# Altium PCB MPU6050_Board.PcbDoc
Units mil, origin at the board's own origin, x right, y up, seen from the top; angles counter-clockwise.
Board outline 825 x 1075 mil, 2 copper layers (Top Layer, Bottom Layer), stack 42.17 mil thick; 4 components, 7 nets, 27 pads, 4 vias.
Unrouted connection lines stored in the file: 2.
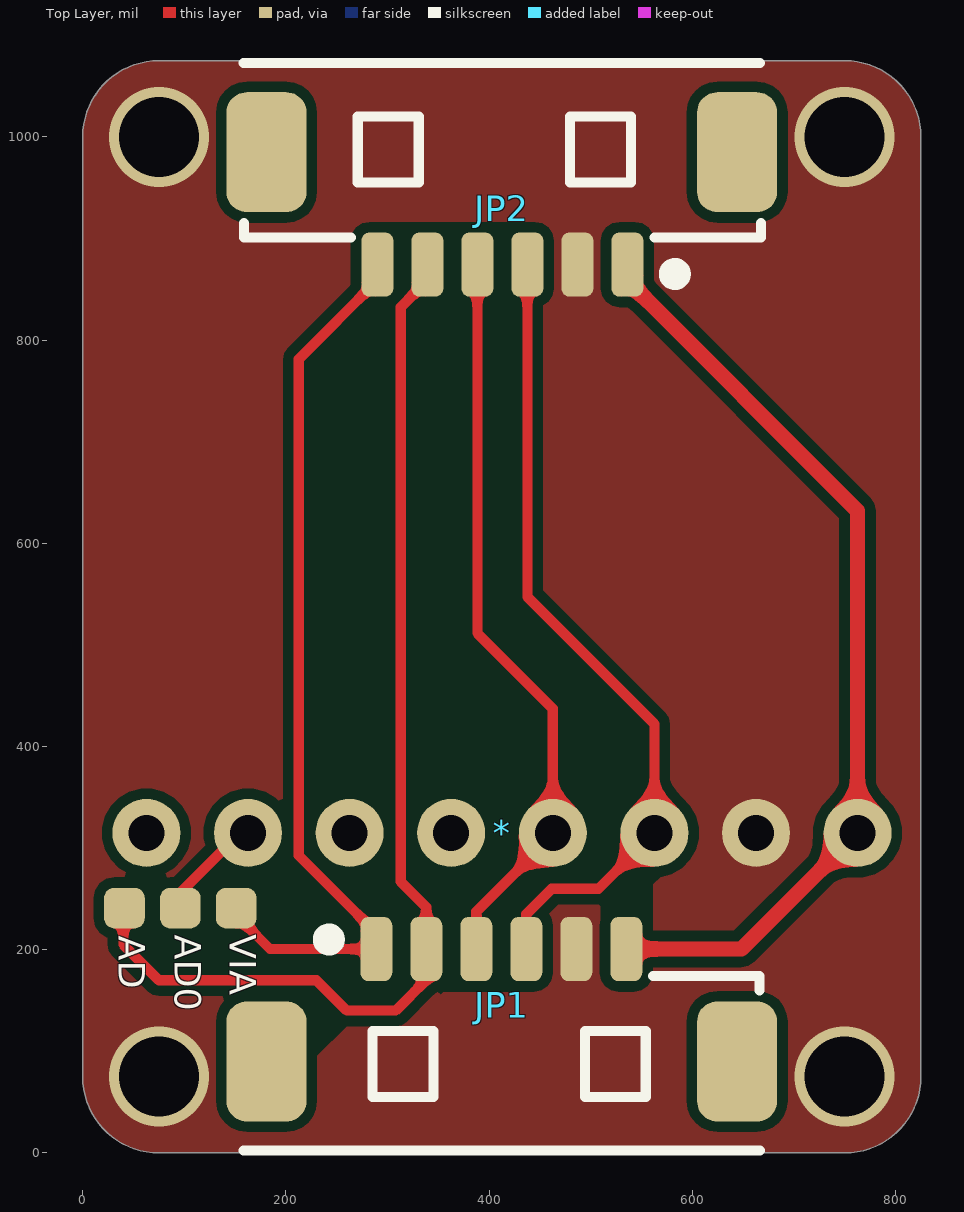
[diagram p0: Top Layer view]
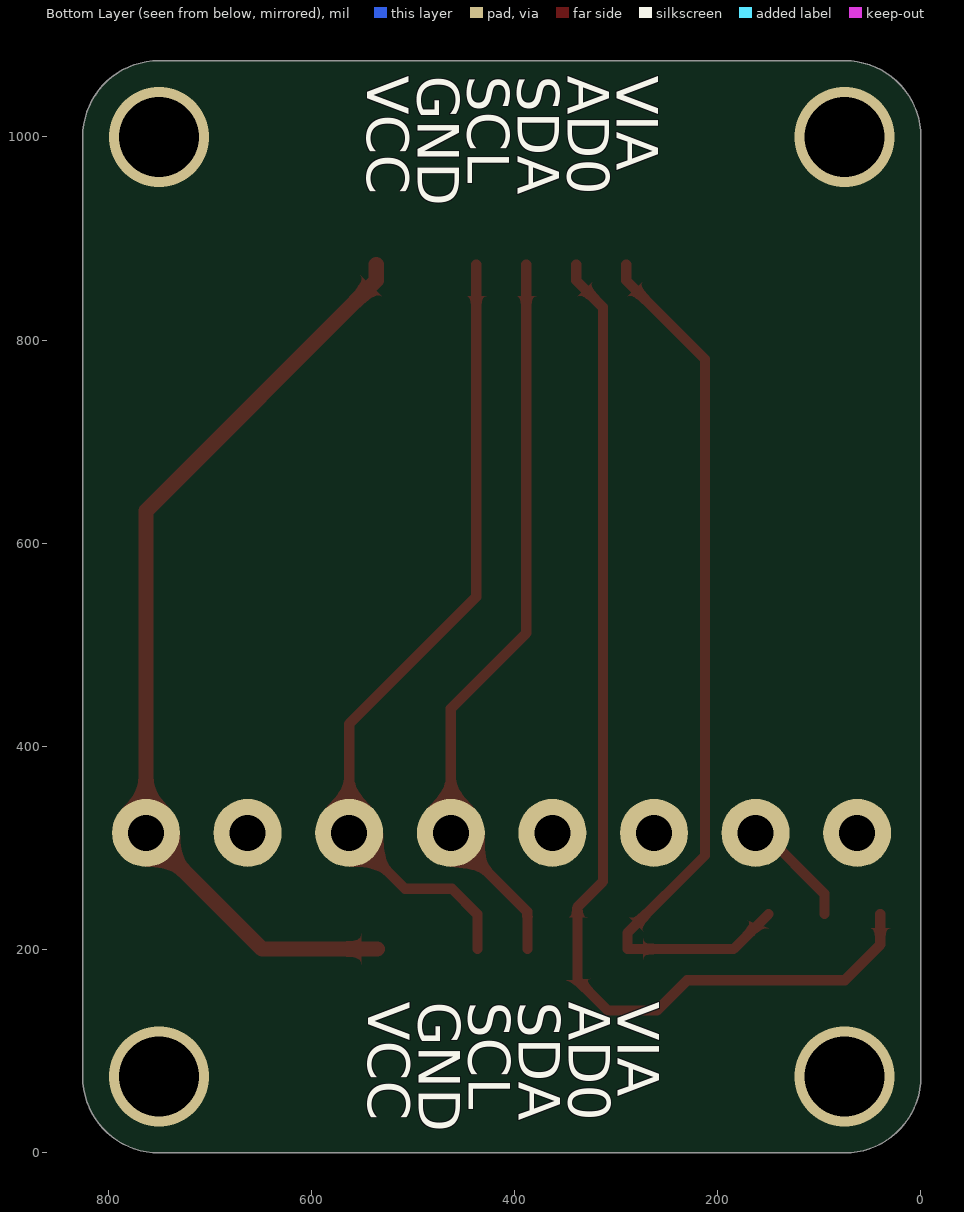
[diagram p1: Bottom Layer view, seen from below]
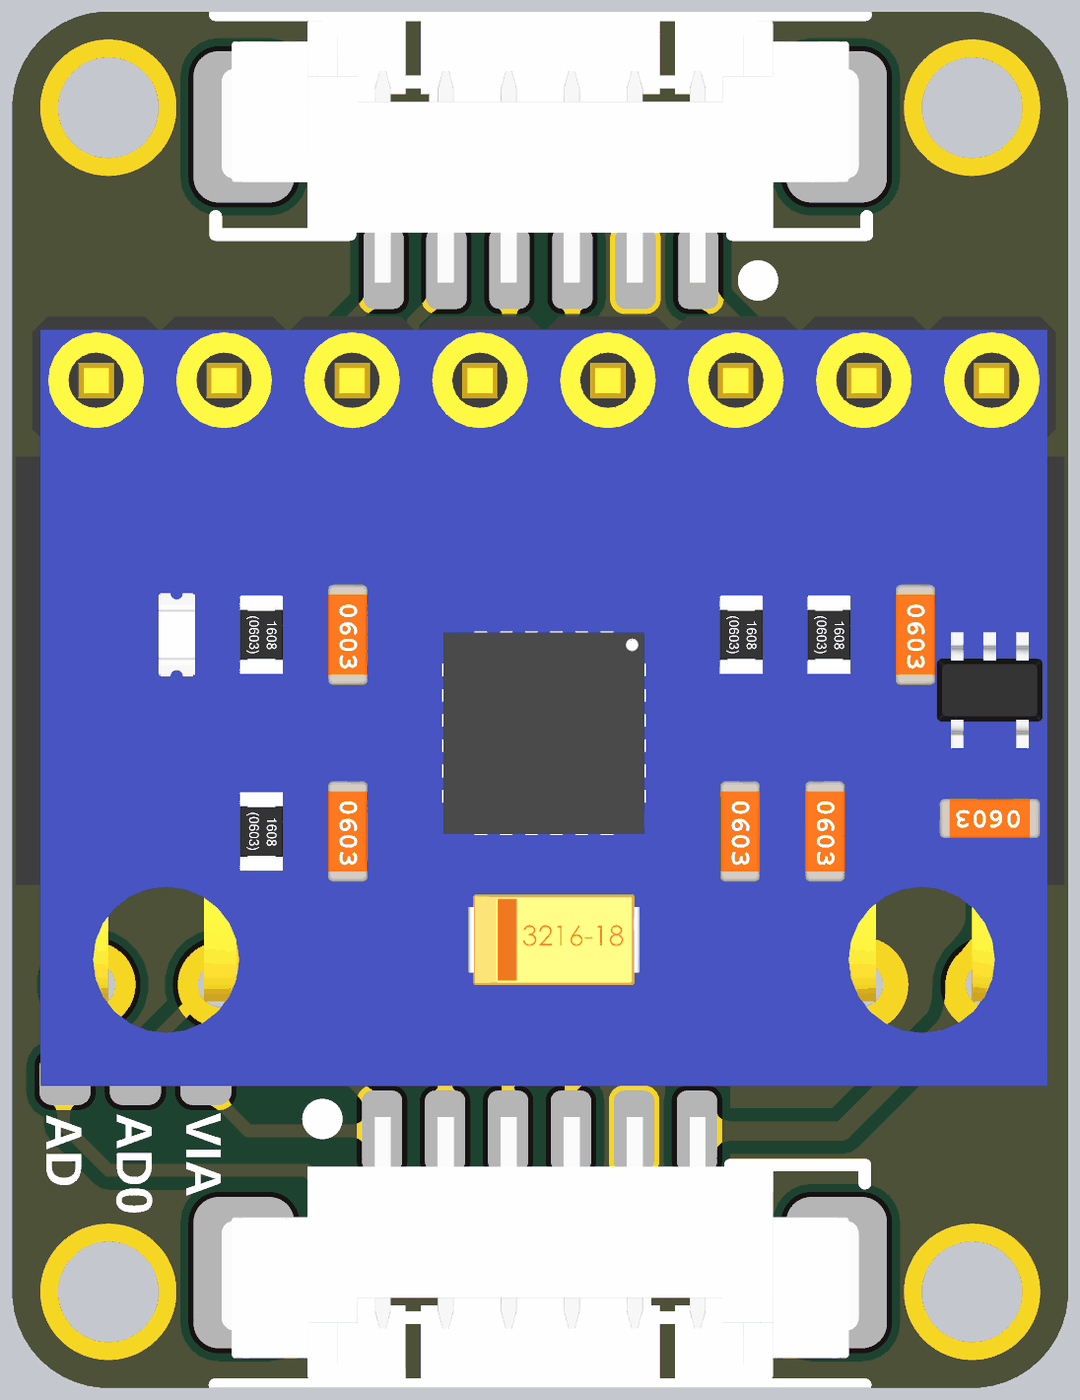
[diagram p2: 3D render of the assembled board from above, using the file's embedded part models]

## Layer stack, top to bottom
Top Solder: solder mask 0.4, Solder Resist, Dk 3.5
Top Layer: signal copper 1.4
Dielectric 1: dielectric 39.3701, FR-4, Dk 4.8
Bottom Layer: signal copper 1.4
Bottom Solder: solder mask 0.4, Solder Resist, Dk 3.5

## Board outline
0,75 0,1000 cw(c75,1000) 75,1075 750,1075 cw(c750,1000) 825,1000 825,75 cw(c750,75) 750,0 75,0 cw(c75,75)

## Design rules (kind name [scope] priority, off if disabled: settings)
Clearance [All] p1: gap=6 ignorepadtopadclearanceinfootprint=FALSE except(0: Arc-Hole Track-Hole SMDPad-Hole THPad-Hole Via-Hole Fill-Hole Poly-Hole Region-Hole Text-Hole; 10: Arc-Fill Arc-Poly Arc-Region Track-Fill Track-Poly Track-Region SMDPad-Fill SMDPad-Poly SMDPad-Region THPad-Fill THPad-Poly THPad-Region Via-Fill Via-Poly Via-Region Fill-Fill Fill-Poly Fill-Region Poly-Poly Poly-Region Region-Region)
PlaneClearance [All] p1: clearance=30
PolygonConnect [All] p1: connectstyle=Direct reliefconductorwidth=10 reliefentries=4 polygonreliefangle="90 Angle" airgapwidth=10
RoutingVias [All] p1: holewidth=28 width=50 viastyle="Through Hole" minholewidth=28 minwidth=50 maxholewidth=28 maxwidth=50
SolderMaskExpansion [All] p1: expansion=4 istentingtop=FALSE
Width [All] p1: maxlimit=50 minlimit=10 preferedwidth=15 minimp=50.000000 maximp=50.000000 favimp=50.000000
29 further rules are at their usual default settings.

## Classes and differential pairs
component class MPU6050_Board: * JP1 JP2

## Components (designator, comment, footprint, x,y, rotation, side; value= is the part's Value field where it differs from the comment)
* "MPU6050" PCBComponent_1 62.7,315 r0 top
JP1 "HDR-1X6" "MX 1.25-WS-6P" 412.5,90 r0 top
JP2 "HDR-1X6" "MX 1.25-WS-6P" 412.5,985 r180 top
? "跳线 3-2" "跳线 3-2" 41.1,240.95 r0 top

## Footprints (in the part's own frame and the unit in brackets; to place one, negate y for a bottom-side part, rotate by r counter-clockwise, add the part's x,y. Pads: shape width x height; smd on the part's side, far side on the other; paste and mask are expansions set on the pad)
"MX 1.25-WS-6P" [mm] "长：12.65mm，宽：4.2mm，高：3.4mm"
  rrect50% 2x3 smd: 0(-5.882,0) 0(5.882,0)
  rrect50% 0.8x1.6 smd: 1(-3.139,2.811) 2(-1.889,2.811) 3(-0.639,2.811) 4(0.611,2.811) 5(1.861,2.811) 6(3.111,2.811)
  silkscreen extent -6.46,-2.23 6.45,3.25, body extent -6.32,-2.1 6.32,3.09, height 3.4
PCBComponent_1 [mm]
  round 1.7 hole 0.9: 1(17.78,0) 2(15.24,0) 3(12.7,0) 4(10.16,0) 5(7.62,0) 6(5.08,0) 7(2.54,0) 8(0,0)
  body extent -1.53,-2.01 19.3,13.25, height 9.03
"跳线 3-2" [mil]
  rrect50% 40x40 smd: 1(0,0) 2(55,0) 3(110,0)

## Part data
JP1 JP2: library part "Header 6", "6P接插件", BOM名称=6P接插件, 学习资源=www.ooocke.com, 版权归属=源创客

## Via types
v1: diameter 98.43, hole 78.74, Top Layer to Bottom Layer, 4 vias

## Nets (pads, with @x,y where several pads share a name; then routed paths per layer and width w, separated by ;. In a path a pad name is that pad's centre, name@x,y a point inside that pad or via, vN(x,y) a via of type N, cw(c..) or ccw(c..) an arc to the next point about the centre after c; other vN are vias at no path point)
GND: *.2 JP1.5 JP2.2
  other v1: 75,75 750,75 75,1000 750,1000
Net*_3: *.3 JP1.4 JP2.3 | length 804.8
  Top Layer w10: JP1.4 436.56,235 461.56,260 507.7,260 *.3 562.7,422.3 437.65,547.35 JP2.3
Net*_4: *.4 JP1.3 JP2.4 | length 735.7
  Top Layer w10: JP1.3 387.35,237.35 462.7,312.7 *.4 462.7,437.3 388.44,511.56 JP2.4
Net*_7: *.7 ?.2 | length 112.6
  Top Layer w10: ?.2@95,235 95,255 155,315 *.7
Net_1: ?.1 JP1.2 JP2.5 | length 1093
  Top Layer w10: ?.1@40,235 40,205 75,170 230,170 260,140 308,140 338.14,170.14 JP1.2 338.14,241.86 313.03,266.97 313.03,832.41 339.22,858.6 JP2.5
Net_3: ?.3 JP1.1 JP2.6 | length 890.5
  Top Layer w10: ?.3@150,235 184.35,200.65 JP1.1 288.93,216.4 212.59,292.74 212.59,781.17 290.01,858.6 JP2.6
VCC: *.1 JP1.6 JP2.1 | length 928.3
  Top Layer w15: JP1.6 648.35,200.65 *.1 762.7,631.97 536.07,858.6 JP2.1
pads on no net: *.5 *.6 *.8 JP1.0 JP2.0

## Polygon pours and split planes (outlines as drawn)
GND on Top Layer "GND_L01_P000" (solid, remove dead copper, pour order 0): 0,75 0,1000 cw(c75,1000) 75,1075 750,1075 cw(c750,1000) 825,1000 825,75 cw(c750,75) 750,0 75,0 cw(c75,75)

## Other copper
Top Layer:
  pour cut-out: 265,130 230,95 230,145 225,150
  pour cut-out: 282.14,916.19 445.52,916.19 424.33,895 300,895
  pour cut-out: 444.44,158.81 355.07,158.81 352.27,156.01 338.14,170.14 338.14,181.26
  pour cut-out: 508.89,224.28 510,225.39 510,275 564.96,275 568.42,271.54 561.09,264.2 561.09,218.5

## Silkscreen, mask and mechanical layers (free items; w line width, h text height)
Top Overlay:
  text "AD0" at 81.6,214.64 h45 r270
  text "VIA" at 135.72,215.11 h45 r270
  text "AD" at 26.48,213.93 h45 r270
Bottom Overlay:
  text "VIA" at 313.19,1060.06 h70 r90
  text "AD0" at 361.56,1060.06 h70 r90
  text "SDA" at 410.77,1060.06 h70 r90
  text "SCL" at 459.99,1060.06 h70 r90
  text "GND" at 509.2,1060.06 h70 r90
  text "VCC" at 558.48,1060.06 h70 r90
  text "VIA" at 312.2,148.77 h70 r90
  text "AD0" at 360.57,148.77 h70 r90
  text "SDA" at 409.78,148.77 h70 r90
  text "SCL" at 458.99,148.77 h70 r90
  text "GND" at 508.21,148.77 h70 r90
  text "VCC" at 557.48,148.77 h70 r90
Mechanical 1:
  the board outline again, w10